# EAGLE board pic (EAGLE 5.01)

Size 160 x 100 mm. Coordinates in mm from the lower left corner, seen from the top.
Outline: 0,0 160,0 160,100 0,100 0,0
Copper layers (1*16): Top 0.035mm / dielectric 1.5mm / Bottom 0.035mm
Design rules "default": minimum track width 10mil, minimum drill 24mil, track to track 8mil, track to pad 8mil, pad to pad 8mil, via to via 8mil, smd to smd 8mil, copper to edge 40mil, drill to drill 8mil, minimum pad ring 10mil, minimum via ring 8mil, stop-mask expansion 4mil, vias tented up to drill 0mil, thermal gap 10mil

## Footprints (pad centres in the part's own frame; a part is rotated, then mirrored left to right if it is on the bottom)
DIL40 = drill 0.813 long: 1 -24.13,-7.62; 2 -21.59,-7.62; 3 -19.05,-7.62; 4 -16.51,-7.62; 5 -13.97,-7.62; 6 -11.43,-7.62; 7 -8.89,-7.62; 8 -6.35,-7.62; 9 -3.81,-7.62; 10 -1.27,-7.62; 11 1.27,-7.62; 12 3.81,-7.62; 13 6.35,-7.62; 14 8.89,-7.62; 15 11.43,-7.62; 16 13.97,-7.62; 17 16.51,-7.62; 18 19.05,-7.62; 19 21.59,-7.62; 20 24.13,-7.62; 21 24.13,7.62; 22 21.59,7.62; 23 19.05,7.62; 24 16.51,7.62; 25 13.97,7.62; 26 11.43,7.62; 27 8.89,7.62; 28 6.35,7.62; 29 3.81,7.62; 30 1.27,7.62; 31 -1.27,7.62; 32 -3.81,7.62; 33 -6.35,7.62; 34 -8.89,7.62; 35 -11.43,7.62; 36 -13.97,7.62; 37 -16.51,7.62; 38 -19.05,7.62; 39 -21.59,7.62; 40 -24.13,7.62
P0613/15 = drill 1.016 octagon: 1 -7.62,0; 2 7.62,0
TO18 = drill 0.813 octagon: 1 -1.27,-1.27; 2 1.27,-1.27; 3 1.27,1.27

## Placement (x,y rotation side)
IC1  PIC16F877P  [DIL40]  18.41,56.35 270 top
R1  [P0613/15]  51.43,79.21 0 top
R2  [P0613/15]  51.43,72.86 0 top
R3  [P0613/15]  51.43,66.51 0 top
R4  [P0613/15]  51.43,60.16 0 top
R5  [P0613/15]  51.43,53.81 0 top
R6  [P0613/15]  51.43,47.46 0 top
R7  [P0613/15]  51.43,41.11 0 top
R8  [P0613/15]  80.64,79.21 0 top
R9  [P0613/15]  80.64,72.86 0 top
R10  [P0613/15]  80.64,66.51 0 top
R11  [P0613/15]  80.64,60.16 0 top
R12  [P0613/15]  80.64,53.81 0 top
R13  [P0613/15]  80.64,47.46 0 top
R14  [P0613/15]  80.64,41.11 0 top
T1  [TO18]  66.67,42.38 270 top
T2  [TO18]  66.67,61.43 270 top
T3  [TO18]  66.67,80.48 270 top
T4  [TO18]  66.67,55.08 270 top
T5  [TO18]  66.67,48.73 270 top
T6  [TO18]  66.67,74.13 270 top
T7  [TO18]  66.67,67.78 270 top

## Library data of the parts
IC1 = microchip
R1-R14 = resistor
T1-T7 = transistor

## Nets
S$1: R1.2 T3.2
S$2: R2.2 T6.2
S$3: R3.2 T7.2
S$4: R4.2 T2.2
S$5: R7.2 T1.2
S$6: R6.2 T5.2
S$7: R5.2 T4.2
S$8: R8.1 T3.3
S$9: R9.1 T6.3
S$10: R10.1 T7.3
S$11: R11.1 T2.3
S$12: R12.1 T4.3
S$13: R13.1 T5.3
S$14: R14.1 T1.3
S$15: T1.1 T2.1 T3.1 T4.1 T5.1 T6.1 T7.1
S$16: IC1.39 R1.1
S$17: IC1.38 R2.1
S$18: IC1.37 R3.1
S$19: IC1.36 R4.1
S$20: IC1.35 R5.1
S$21: IC1.34 R6.1
S$22: IC1.33 R7.1
VDD: IC1.11 IC1.32
VSS: IC1.12 IC1.31

## Tracks (layer width: path | path; a pad name or v marks a point on that pad's centre or on a via)
S$1  (1 unrouted)
S$2  (1 unrouted)
S$3  (1 unrouted)
S$4  (1 unrouted)
S$5  (1 unrouted)
S$6  (1 unrouted)
S$7  (1 unrouted)
S$8  (1 unrouted)
S$9  (1 unrouted)
S$10  (1 unrouted)
S$11  (1 unrouted)
S$12  (1 unrouted)
S$13  (1 unrouted)
S$14  (1 unrouted)
S$15  (6 unrouted)
S$16  (1 unrouted)
S$17  (1 unrouted)
S$18  (1 unrouted)
S$19  (1 unrouted)
S$20  (1 unrouted)
S$21  (1 unrouted)
S$22  (1 unrouted)
VDD  (1 unrouted)
VSS  (1 unrouted)